# Altium PCB PCB1.pcbdoc
Units mil, origin at the board's own origin, x right, y up, seen from the top; angles counter-clockwise.
Board outline 1800 x 2040 mil, 2 copper layers (Top Layer, Bottom Layer); 13 components, 18 nets, 68 pads, 30 vias.
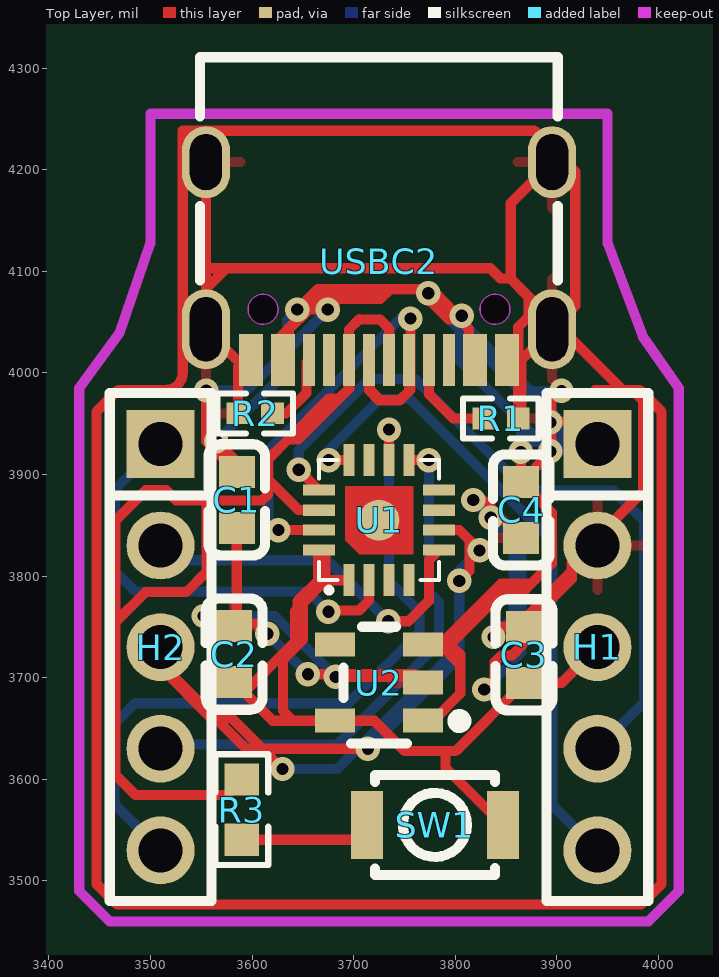
[diagram p0: Top Layer view]
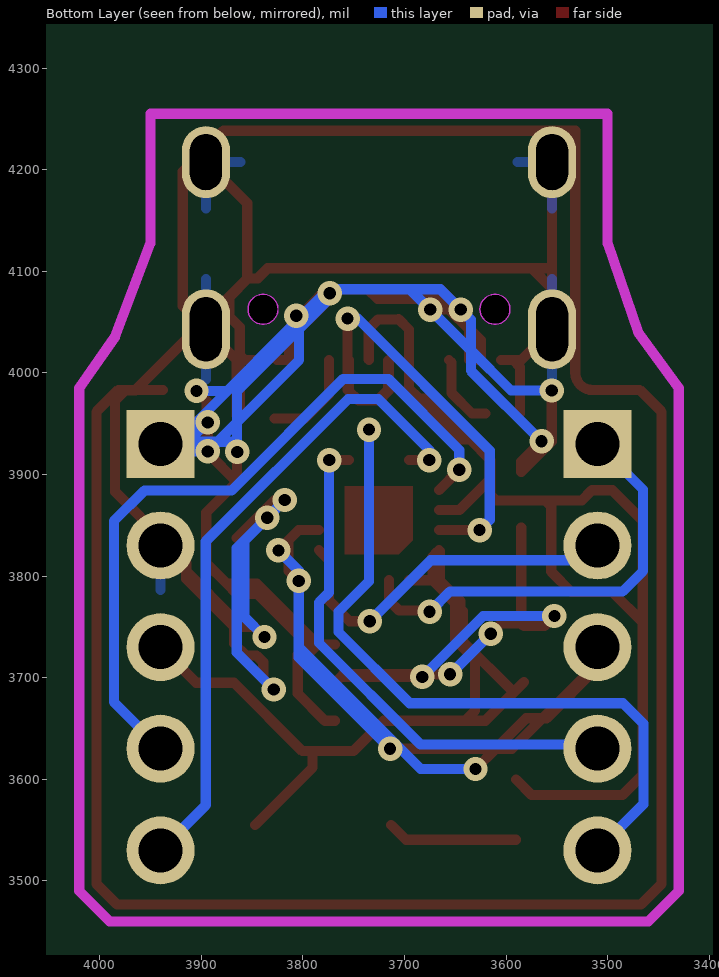
[diagram p1: Bottom Layer view, seen from below]

## Layer stack, top to bottom
Top Layer: signal copper (thickness not stored)
Dielectric: dielectric 12.6, FR-4, Dk 4.8
Bottom Layer: signal copper (thickness not stored)

## Board outline
4550,2750 2750,2750 2750,4790 4550,4790

## Design rules (kind name [scope] priority, off if disabled: settings)
BoardOutlineClearance copperThickness1oz [All] p0: genericclearance=10 ignorepadtopadclearanceinfootprint=FALSE except(0: Arc-SplitContinuation Track-SplitContinuation SMDPad-SplitContinuation THPad-SplitContinuation Via-SplitContinuation Fill-SplitContinuation Poly-SplitContinuation Region-SplitContinuation Text-SplitContinuation; 6: Track-CutoutEdge SMDPad-CutoutEdge THPad-CutoutEdge Via-CutoutEdge Region-CutoutEdge; 11.8: Track-OutlineEdge SMDPad-OutlineEdge THPad-OutlineEdge Via-OutlineEdge Fill-OutlineEdge Region-OutlineEdge Poly-OutlineEdge Text-OutlineEdge Fill-CutoutEdge)
BoardOutlineClearance copperThickness2oz [All] p0: genericclearance=10 ignorepadtopadclearanceinfootprint=FALSE except(0: Arc-SplitContinuation Track-SplitContinuation SMDPad-SplitContinuation THPad-SplitContinuation Via-SplitContinuation Fill-SplitContinuation Poly-SplitContinuation Region-SplitContinuation Text-SplitContinuation; 6: Track-CutoutEdge SMDPad-CutoutEdge THPad-CutoutEdge Via-CutoutEdge Region-CutoutEdge; 11.8: Track-OutlineEdge SMDPad-OutlineEdge THPad-OutlineEdge Via-OutlineEdge Fill-OutlineEdge Region-OutlineEdge Poly-OutlineEdge Text-OutlineEdge Fill-CutoutEdge)
Clearance copperThickness1oz [(InNet('+5V') OR InNet('GND') OR InNet('VCC') OR InNet('$1N1340') OR InNet('$1N1346') OR InNet('DN') OR InNet('DP') OR InNet('SDA') OR InNet('SCL') OR InNet('RX') OR InNet('TX') OR InNet('SCK') OR InNet('MISO') OR InNet('MOSI') OR InNet('$1N2150') OR InNet('$1N2123') OR InNet('$1N2118') OR InNet('$1N2274'))] p1: gap=7 ignorepadtopadclearanceinfootprint=FALSE except(4: Track-Track; 6: Track-SMDPad SMDPad-SMDPad Track-THPad SMDPad-THPad THPad-THPad Track-Via SMDPad-Via THPad-Via Via-Via SMDPad-Fill THPad-Fill Via-Fill Fill-Fill Track-Region SMDPad-Region THPad-Region Via-Region Region-Region Track-Poly SMDPad-Poly THPad-Poly Via-Poly Fill-Poly Region-Poly Poly-Poly Track-Text SMDPad-Text THPad-Text Via-Text Fill-Text Region-Text Poly-Text Text-Text; 6.9: Track-Hole SMDPad-Hole THPad-Hole Via-Hole Fill-Hole Region-Hole Poly-Hole Text-Hole Sheet-Hole; 11.8: Track-Fill Fill-Region Track-Sheet SMDPad-Sheet THPad-Sheet Via-Sheet Fill-Sheet Region-Sheet Poly-Sheet Text-Sheet)
Clearance copperThickness2oz [All] p1: gap=7 ignorepadtopadclearanceinfootprint=FALSE except(6: Track-SMDPad SMDPad-SMDPad Track-THPad SMDPad-THPad THPad-THPad Track-Via SMDPad-Via THPad-Via Via-Via SMDPad-Fill THPad-Fill Via-Fill Fill-Fill Track-Region SMDPad-Region THPad-Region Via-Region Region-Region Track-Poly SMDPad-Poly THPad-Poly Via-Poly Fill-Poly Region-Poly Poly-Poly Track-Text SMDPad-Text THPad-Text Via-Text Fill-Text Region-Text Poly-Text Text-Text; 6.9: Track-Hole SMDPad-Hole THPad-Hole Via-Hole Fill-Hole Region-Hole Poly-Hole Text-Hole Sheet-Hole; 8: Track-Track; 11.8: Track-Fill Fill-Region Track-Sheet SMDPad-Sheet THPad-Sheet Via-Sheet Fill-Sheet Region-Sheet Poly-Sheet Text-Sheet)
DiffPairsRouting differentialPair [All] p1: maxuncoupledlength=10 minlimit=6 maxlimit=6 mostfreqgap=6 toplayer_minwidth=5 toplayer_prefwidth=10 toplayer_maxwidth=100 bottomlayer_minwidth=5 bottomlayer_prefwidth=10 bottomlayer_maxwidth=100
PasteMaskExpansion pasteMaskExpansion [All] p1: expansion=0
PlaneConnect innerPlane [All] p1: planeconnectstyle=Relief reliefexpansion=20 reliefentries=4 reliefconductorwidth=10 reliefairgap=10
PolygonConnect copperRegion [All] p1: connectstyle=Relief reliefentries=4 reliefconductorwidth=10 polygonreliefangle="90 Angle" airgapwidth=10
RoutingVias viaSize [All] p1: viastyle="Through Hole" holewidth=12.0078 minholewidth=11.811 maxholewidth=248.0314 width=24.0158 minwidth=19.685 maxwidth=393.7008
SolderMaskExpansion solderMaskExpansion [All] p1: useseparateexpansions=TRUE expansion=2 expansionbottom=2
Width copperThickness1oz [All] p1: maxlimit=100 minlimit=5 preferedwidth=10
Width copperThickness2oz [All] p1: maxlimit=100 minlimit=8 preferedwidth=10

## Components (designator, comment, footprint, x,y, rotation, side; value= is the part's Value field where it differs from the comment)
C1 "" C0603 3585,3875 r90 top
C2 "" C0603 3582.41,3723.1 r270 top
C3 "" C0603 3867.68,3722.44 r270 top
C4 "" C0603 3865,3865 r90 top
H1 "" HDR-TH_5P-P2.54-V-M 3940,3730 r270 top
H2 "" HDR-TH_5P-P2.54-V-M 3510,3730 r270 top
R1 "" R0402 3845,3955 r0 top
R2 "" R0402 3603.16,3960 r0 top
R3 "" R0603 3590,3570 r270 top
SW1 "" KEY-SMD_B3U-1000PM 3780,3555 r0 top
U1 "" VQFN-16_L3.0-W3.0-P0.50-BL-EP1.7 3725,3855 r0 top
U2 "" SOT-23-5_L2.9-W1.6-P0.95-LS2.8-BR 3725,3695 r0 top
USBC2 "" USB-C_SMD-TYPE-C-31-M-12 3725,4110 r180 top

## Footprints (in the part's own frame and the unit in brackets; to place one, negate y for a bottom-side part, rotate by r counter-clockwise, add the part's x,y. Pads: shape width x height; smd on the part's side, far side on the other; paste and mask are expansions set on the pad)
C0603 [mm]
  rect 0.8x0.9 smd: 1(-0.7,0) 2(0.7,0)
  silkscreen extent -1.39,-0.71 1.39,0.71
HDR-TH_5P-P2.54-V-M [mm]
  rect 1.7x1.7 hole 1.1: 1(-5.08,0)
  round 1.7 hole 1.1: 2(-2.54,0) 3(0,0) 4(2.54,0) 5(5.08,0)
  silkscreen extent -6.35,-1.27 6.35,1.27
KEY-SMD_B3U-1000PM [mm]
  rect 0.8x1.7 smd: 1(-1.7,0) 2(1.7,0)
  silkscreen extent -1.5,-1.25 1.5,1.25
R0402 [mm]
  rect 0.566x0.54 smd: 1(-0.433,0) 2(0.433,0)
  silkscreen extent -0.94,-0.5 0.94,0.5
R0603 [mil]
  rect 31.75x34.02 smd: 1(-29.66,0) 2(29.66,0)
  silkscreen extent -55,-26 55,26
SOT-23-5_L2.9-W1.6-P0.95-LS2.8-BR [mm]
  rect 1x0.6 smd: 1(1.1,-0.95) 2(1.1,0) 3(1.1,0.95) 4(-1.1,0.95) 5(-1.1,-0.95)
  silkscreen extent -0.89,-1.52 2.16,1.4
USB-C_SMD-TYPE-C-31-M-12 [mm]
  oval 1.2x2 hole 0.8 slot 1.6 at 90 deg: 0(-4.325,1.706) 1(4.325,1.706)
  oval 1.2x1.8 hole 0.8 slot 1.4 at 90 deg: 2(4.325,-2.474) 3(-4.325,-2.474)
  rect 0.3x1.3 smd: A1(-3.35,2.474) A4(-2.55,2.474) A5(-1.25,2.474) A6(-0.25,2.474) A7(0.25,2.474) A8(1.25,2.474) A9(2.55,2.474) A12(3.35,2.474) B1(3.05,2.474) B4(2.25,2.474) B5(1.75,2.474) B6(0.75,2.474) B7(-0.75,2.474) B8(-1.75,2.474) B9(-2.25,2.474) B12(-3.05,2.474)
  Board Outline Layer circle w0.005: c-2.9,1.206 r0.375
  Board Outline Layer circle w0.005: c2.9,1.206 r0.375
  Board Outline Layer region: -3.275,1.206 -3.238,1.368 -3.134,1.499 -2.983,1.571 -2.816,1.571 -2.666,1.499 -2.562,1.368 -2.525,1.206 -2.525,1.206 -2.562,1.043 -2.666,0.912 -2.816,0.84 -2.983,0.84 -3.134,0.912 -3.238,1.043 -3.275,1.206
  Board Outline Layer region: 2.525,1.206 2.562,1.368 2.666,1.499 2.816,1.571 2.983,1.571 3.134,1.499 3.238,1.368 3.275,1.206 3.275,1.206 3.238,1.043 3.134,0.912 2.983,0.84 2.816,0.84 2.666,0.912 2.562,1.043 2.525,1.206
  Multi-Layer board cut-out: -3.275,1.206 -3.238,1.368 -3.134,1.499 -2.983,1.571 -2.816,1.571 -2.666,1.499 -2.562,1.368 -2.525,1.206 -2.525,1.206 -2.562,1.043 -2.666,0.912 -2.816,0.84 -2.983,0.84 -3.134,0.912 -3.238,1.043 -3.275,1.206
  Multi-Layer board cut-out: 2.525,1.206 2.562,1.368 2.666,1.499 2.816,1.571 2.983,1.571 3.134,1.499 3.238,1.368 3.275,1.206 3.275,1.206 3.238,1.043 3.134,0.912 2.983,0.84 2.816,0.84 2.666,0.912 2.562,1.043 2.525,1.206
  silkscreen extent -4.47,-5.09 4.47,0.49
VQFN-16_L3.0-W3.0-P0.50-BL-EP1.7 [mm]
  rect 0.28x0.8 smd: 1(-0.749,-1.5) 2(-0.249,-1.5) 3(0.249,-1.5) 4(0.749,-1.5) 9(0.749,1.5) 10(0.249,1.5) 11(-0.249,1.5) 12(-0.749,1.5)
  rect 0.8x0.28 smd: 5(1.5,-0.749) 6(1.5,-0.249) 7(1.5,0.249) 8(1.5,0.749) 13(-1.5,0.749) 14(-1.5,0.249) 15(-1.5,-0.249) 16(-1.5,-0.749)
  round 1.02 smd: 17(0,0)
  Top Layer region: -0.85,-0.5 -0.85,0.85 0.85,0.85 0.85,-0.85 -0.5,-0.85
  silkscreen extent -1.5,-1.76 1.5,1.5

## Via types
v1: diameter 24.02, hole 12.01, Top Layer to Bottom Layer, 30 vias

## Nets (pads, with @x,y where several pads share a name; then routed paths per layer and width w, separated by ;. In a path a pad name is that pad's centre, name@x,y a point inside that pad or via, vN(x,y) a via of type N, cw(c..) or ccw(c..) an arc to the next point about the centre after c; other vN are vias at no path point)
$1N1340: R1.1 USBC2.A5 | length 97.4
  Top Layer w10: USBC2.A5 3774.21,3978.75 3797.96,3955 R1.1
$1N1346: R2.2 USBC2.B5 | length 75.3
  Top Layer w10: R2.2 3633.51,3960 3653.51,3980 3653.51,4010 USBC2.B5
$1N2118: U1.7
$1N2123: U1.8
$1N2150: U1.11
$1N2274: R3.2 SW1.1 | length 129.1
  Top Layer w10: R3.2 3698.41,3540.34 SW1.1
+5V: C1.2 C4.2 H1.1 U2.1 U2.3 USBC2.A4 USBC2.A9 USBC2.B4 USBC2.B9 | length 3039.6
  Top Layer w10: v1(3555,3982.56) 3555,3932.56 C1.2 3585,3912.56 v1(3565,3932.56) ; U2.1 3778.31,3657.61 3805,3684.3 3805,3712.56 ; U2.3@3768.47,3732.56 U2.3@3785,3732.56 ; v1(3773.45,4078.3) v1@3777.87,4078.3 ; v1(3806.41,4056.18) 3804.32,4056.18 v1@3803.58,4055.43 ; USBC2.A4 USBC2.B9 3813.58,4042.59 ; v1(3864.6,3922.16) 3864.6,3892.96 C4.2 ; v1(3893.61,3951.17) v1@3893.61,3921.17 ; v1(3904.6,3982.16) 3894.6,3972.16 v1@3894.6,3952.16 ; H1.1 3917.84,3952.16 v1@3894.6,3952.16 ; v1@3644.6,4052.16 v1(3644.6,4062.16) 3664.6,4082.16 3675.99,4082.16 ; v1@3644.6,4052.16 3654.6,4062.16 v1@3655.99,4062.16 ; v1@3644.6,4052.16 3624.6,4032.16 USBC2.A9 USBC2.B4 3636.42,4042.59 v1@3655.99,4062.16 ; v1@3655.99,4062.16 v1(3674.6,4062.16) 3685.03,4072.59 ; v1@3655.99,4062.16 3666.42,4072.59 ; 3666.42,4072.59 3675.99,4082.16 ; 3666.42,4072.59 3685.03,4072.59 ; 3675.99,4082.16 3694.6,4082.16 ; 3675.99,4082.16 3676.42,4082.59 3736.42,4082.59 ; 3685.03,4072.59 3694.6,4082.16 ; 3685.03,4072.59 3726.42,4072.59 3735.99,4082.16 ; 3694.6,4082.16 3735.99,4082.16 ; 3735.99,4082.16 v1@3764.01,4082.16 ; 3735.99,4082.16 3736.42,4082.59 ; 3736.42,4082.59 v1@3763.58,4082.59 ; v1@3763.58,4082.59 v1@3764.01,4082.16 ; v1@3763.58,4082.59 v1@3773.58,4082.59 ; v1@3764.01,4082.16 3793.58,4052.59 v1@3803.58,4052.59 ; v1@3764.01,4082.16 v1@3774.01,4082.16 ; v1@3773.58,4082.59 v1@3774.01,4082.59 ; v1@3773.58,4082.59 v1@3774.01,4082.16 ; v1@3774.01,4082.16 v1@3774.6,4082.16 ; v1@3774.01,4082.16 v1@3777.87,4078.3 ; v1@3774.01,4082.59 v1@3774.6,4082.16 ; v1@3774.01,4082.59 3776.42,4082.59 3793.21,4065.8 ; v1@3774.6,4082.16 3790.96,4065.8 ; v1@3777.87,4078.3 3790.37,4065.8 ; U2.3@3785,3732.56 3845,3792.56 3875,3792.56 ; U2.3@3785,3732.56 3805,3712.56 ; U2.3@3785,3732.56 3795,3732.56 ; 3790.37,4065.8 3790.96,4065.8 ; 3790.37,4065.8 v1@3803.58,4052.59 ; 3790.96,4065.8 3793.21,4065.8 ; 3790.96,4065.8 v1@3803.58,4053.18 ; 3793.21,4065.8 v1@3803.58,4055.43 ; 3795,3732.56 3845,3782.56 3865,3782.56 3875,3792.56 ; 3795,3732.56 3805,3722.56 3805,3712.56 ; v1@3803.58,4052.59 v1@3803.58,4053.18 ; v1@3803.58,4052.59 3813.58,4042.59 ; v1@3803.58,4053.18 3813.58,4043.18 3813.58,4042.59 ; v1@3803.58,4053.18 v1@3803.58,4055.43 ; C4.2 3895,3862.56 3895,3812.56 3875,3792.56 ; C4.2 v1@3893.61,3921.17 ; v1@3893.61,3921.17 3894.6,3922.16 v1@3894.6,3952.16
  Bottom Layer w10: v1(3555,3982.56) 3595,3982.56 3634.6,4022.16 ; v1(3565,3932.56) 3634.6,4002.16 3634.6,4022.16 ; v1(3773.45,4078.3) v1@3803.58,4048.17 ; v1(3806.41,4056.18) 3806.41,4056.01 v1@3803.58,4053.18 ; v1(3864.6,3922.16) v1@3864.6,3932.16 ; v1(3893.61,3951.17) 3903.61,3941.17 H1.1@3915,3941.17 ; v1(3904.6,3982.16) 3874.6,3982.16 3816.42,4040.34 ; 3634.6,4022.16 3634.6,4052.16 v1(3644.6,4062.16) 3664.6,4082.16 3694.6,4082.16 ; 3634.6,4022.16 v1(3674.6,4062.16) 3694.6,4082.16 ; 3694.6,4082.16 v1@3764.6,4082.16 ; v1@3764.6,4082.16 3774.6,4082.16 v1@3803.58,4053.18 ; v1@3764.6,4082.16 3803.58,4043.18 ; 3803.58,4043.18 3864.6,3982.16 3864.6,3951.57 ; 3803.58,4043.18 3803.58,4012.59 3864.6,3951.57 ; 3803.58,4043.18 v1@3803.58,4048.17 ; v1@3803.58,4048.17 3811.41,4040.34 3816.42,4040.34 ; v1@3803.58,4048.17 v1@3803.58,4053.18 ; v1@3803.58,4053.18 3816.42,4040.34 ; 3816.42,4040.34 3816.42,4039.75 H1.1@3915,3941.17 ; v1@3864.6,3932.16 3864.6,3951.57 ; v1@3864.6,3932.16 3884.01,3932.16 ; 3864.6,3951.57 3884.01,3932.16 ; 3884.01,3932.16 v1(3893.58,3922.59) 3932.59,3922.59 H1.1 H1.1@3937.84,3932.16 ; 3884.01,3932.16 H1.1@3937.84,3932.16 ; H1.1@3915,3941.17 3928.83,3941.17 H1.1@3937.84,3932.16
DN: U1.15 USBC2.A7 USBC2.B7 | length 561.5
  Top Layer w10: v1(3625.95,3845.2) U1.15 ; v1(3755.95,4053.38) USBC2.B7@3755.95,4013.38 ; 3745.95,3973.38 3725.95,3973.38 3715.95,3983.38 3715.95,4011.81 USBC2.A7 3715.16,3982.59 3725.16,3972.59 3745.16,3972.59 3745.95,3973.38 ; 3745.95,3973.38 3754.53,3981.96 ; 3754.53,3981.96 USBC2.B7 USBC2.B7@3755.95,4013.38 ; 3754.53,3981.96 3755.95,3983.38 USBC2.B7@3755.95,4013.38
  Bottom Layer w10: v1(3625.95,3845.2) 3615.95,3855.2 3615.95,3923.38 3745.95,4053.38 v1(3755.95,4053.38)
DP: R3.1 U1.14 USBC2.A6 USBC2.B6 | length 1216.1
  Top Layer w10: R3.1 3574.67,3584.33 3485.47,3584.33 3465.47,3604.33 3465.47,3754.33 ; U1.14 3645.95,3864.8 3615.95,3894.8 3615.95,3914.8 ; 3695.95,3984.8 3695.47,3984.33 ; 3705.71,4052.83 3705.47,4052.59 ; 3465.47,3754.33 3495.47,3784.33 3535.47,3784.33 3555.47,3804.33 3555.47,3868.56 3561.24,3874.33 ; 3465.47,3754.33 3465.47,3854.33 3495.47,3884.33 3515.47,3884.33 3525.47,3874.33 3561.24,3874.33 ; 3561.24,3874.33 3609.7,3874.33 3615.47,3880.1 3615.47,3914.33 3615.95,3914.8 ; 3615.95,3914.8 3635.47,3934.33 ; 3635.47,3934.33 3645.47,3934.33 3685.95,3974.8 ; 3635.47,3934.33 3675.95,3974.8 3685.95,3974.8 ; 3685.95,3974.8 3695.47,3984.33 ; 3695.47,3984.33 USBC2.B6 3695.47,4042.59 3705.47,4052.59 ; 3705.47,4052.59 3725.47,4052.59 ; 3725.47,4052.59 3725.95,4052.59 3734.84,4043.7 3734.84,4043.22 ; 3725.47,4052.59 3734.84,4043.22 ; 3734.84,4043.22 USBC2.A6 3735.47,4013.22 3735.47,4042.59 3734.84,4043.22
GND: C1.1 C2.1 C3.1 C4.1 H1.2 R1.2 R2.1 U2.2 USBC2.0 USBC2.1 USBC2.2 USBC2.3 USBC2.A1 USBC2.A12 USBC2.B1 USBC2.B12 | length 5251.6
  Top Layer w10: v1(3552.41,3760.66) 3562.41,3750.66 C2.1 C2.1@3585,3753.25 ; USBC2.2 3554.72,4102.84 ; C1.1 C2.1@3585,3753.25 ; R2.1 3586.12,4005.6 USBC2.A12 ; USBC2.B1 USBC2.A12 ; v1(3615,3743.25) 3605,3753.25 C2.1@3585,3753.25 ; v1(3655,3703.25) 3760.06,3703.25 U2.2@3762.65,3700.66 ; v1(3682.41,3700.66) U2.2@3762.65,3700.66 ; U2.2 U2.2@3762.65,3700.66 ; v1(3817.68,3874.76) 3827.68,3874.76 v1@3845.12,3857.32 ; v1(3828.57,3688.29) 3838.98,3698.7 3838.98,3715.18 3845.41,3721.61 3855.74,3721.61 3867.68,3733.55 C3.1 ; v1(3835,3857.32) v1@3845.12,3857.32 ; v1(3837.68,3740) 3847.68,3750 C3.1 ; USBC2.B12 USBC2.A1 ; C4.1 v1@3845.12,3857.32 ; USBC2.3 3854.72,4166.84 3854.72,4092.84 ; 3937.79,3983.19 3964.37,3983.19 ; 3554.72,4082.84 3574.72,4102.84 ; 3554.72,4082.84 USBC2.1 3584.97,4012.59 USBC2.A12 ; 3554.72,4082.84 3554.72,4102.84 ; 3554.72,4102.84 3574.72,4102.84 ; 3574.72,4102.84 3834.2,4102.84 ; 3834.2,4102.84 3844.2,4092.84 3844.72,4092.84 ; 3834.2,4102.84 3834.72,4102.84 3844.72,4092.84 ; 3844.72,4092.84 3854.2,4092.84 ; 3854.2,4092.84 3872.04,4075 USBC2.0@3872.04,4055 ; 3854.2,4092.84 3854.72,4092.84 ; 3854.72,4092.84 USBC2.0@3900,4047.56 ; USBC2.A1 3859.3,4015 USBC2.A1@3862.04,4015 ; USBC2.A1 USBC2.A1@3862.04,4012.75 ; USBC2.A1@3862.04,4012.75 3865.28,4012.84 ; USBC2.A1@3862.04,4012.75 USBC2.A1@3862.04,4015 ; USBC2.A1@3862.04,4012.75 R1.2 3865.28,3958.24 3865.28,4012.84 ; USBC2.A1@3862.04,4015 3862.04,4045 USBC2.0@3872.04,4055 ; 3865.28,4012.84 USBC2.0 ; C3.1 3867.68,3757.68 3914.72,3804.72 ; C3.1 3914.72,3797.04 3914.72,3804.72 ; USBC2.0@3872.04,4055 3883.12,4055 USBC2.0 ; USBC2.0 USBC2.0@3904.72,4042.84 ; USBC2.0 USBC2.0@3900,4047.56 ; USBC2.0@3900,4047.56 USBC2.0@3904.72,4042.84 ; USBC2.0@3900,4047.56 3918.19,4065.75 3918.19,4198.19 3878.19,4238.19 3531.81,4238.19 3531.81,4000 cw(c3515,4000) 3515,3983.19 3468.45,3983.19 3446.81,3961.55 3446.81,3496.96 3466.96,3476.81 3983.04,3476.81 4003.19,3496.96 4003.19,3961.55 3981.55,3983.19 3964.37,3983.19 ; USBC2.0@3904.72,4042.84 3964.37,3983.19 ; 3914.72,3804.72 H1.2 3937.16,3832.84 H1.2@3934.72,3832.84 ; 3914.72,3804.72 3914.72,3812.84 H1.2@3934.72,3832.84 ; H1.2@3934.72,3832.84 3984.72,3882.84 3984.72,3972.84 3974.72,3982.84 3964.72,3982.84 3964.37,3983.19
  Bottom Layer w10: v1(3552.41,3760.66) 3622.41,3760.66 v1(3682.41,3700.66) ; v1(3615,3743.25) v1(3655,3703.25) ; v1(3817.68,3874.76) 3835.06,3857.38 3857.68,3834.76 3857.68,3834.64 ; v1(3828.57,3688.29) 3865,3724.72 3865,3827.32 3857.68,3834.64 ; v1(3835,3857.32) 3857.68,3834.64 ; v1(3837.68,3740) 3857.68,3760 3857.68,3834.64
MISO: H2.2 U1.5 | length 357.3
  Top Layer w10: v1(3734.05,3755.51) 3754.05,3755.51 3774.05,3775.51 3774.05,3815.51 U1.5
  Bottom Layer w10: H2.2 3524.49,3815.51 3674.05,3815.51 v1(3734.05,3755.51)
MOSI: H2.1 U1.2 | length 434.9
  Top Layer w10: v1(3675.2,3764.8) 3676.36,3765.95 3705.2,3765.95 3715.2,3775.95 U1.2
  Bottom Layer w10: H2.1 3465.2,3885.2 3465.2,3804.8 3485.2,3784.8 3655.2,3784.8 v1(3675.2,3764.8)
RX: H2.5 U1.10 | length 722.5
  Top Layer w10: U1.10 v1(3734.8,3944.05)
  Bottom Layer w10: H2.5 3464.8,3575.2 3464.8,3654.8 3484.8,3674.8 3694.8,3674.8 3764.8,3744.8 3764.8,3764.8 3734.8,3794.8 v1(3734.8,3944.05)
SCK: H2.3 U1.6 | length 993.2
  Top Layer w10: v1(3630,3610) 3610,3630 ; v1(3714.05,3630) 3610,3630 ; U1.6 3804.05,3845.2 3814.05,3835.2 ; v1(3804.05,3795.2) 3814.05,3805.2 3814.05,3835.2 ; v1(3824.05,3825.2) 3814.05,3835.2 ; 3564.05,3660 3594.05,3630 3610,3630 ; 3564.05,3660 3514.05,3710 3514.05,3725.95 H2.3 3510,3710 3560,3660 3564.05,3660 ; 3564.05,3660 3580,3660 3610,3630
  Bottom Layer w10: v1(3630,3610) 3684.05,3610 3804.05,3730 ; v1(3714.05,3630) 3804.05,3720 3804.05,3730 ; v1(3824.05,3825.2) 3804.05,3805.2 v1(3804.05,3795.2) 3804.05,3730
SCL: H1.5 U1.12 | length 651.2
  Top Layer w10: v1(3675.51,3914.05) U1.12
  Bottom Layer w10: v1(3675.51,3914.05) 3675.51,3924.05 3725.51,3974.05 3755.51,3974.05 3895.51,3834.05 3895.51,3574.49 H1.5
SDA: H1.4 U1.13 | length 717.9
  Top Layer w10: v1(3645.95,3904.51) U1.13
  Bottom Layer w10: v1(3645.95,3904.51) 3645.95,3924.05 3715.95,3994.05 3760.18,3994.05 3870.18,3884.05 3955.95,3884.05 3985.95,3854.05 3985.95,3675.95 H1.4
TX: H2.4 U1.9 | length 520.8
  Top Layer w10: U1.9 v1(3774.05,3914.05)
  Bottom Layer w10: H2.4 3514.05,3634.05 3684.05,3634.05 3784.05,3734.05 3784.05,3774.05 3774.05,3784.05 v1(3774.05,3914.05)
VCC: C2.2 C3.2 H1.3 SW1.2 U1.1 U1.16 U2.5 | length 1042.2
  Top Layer w10: C2.2 C2.2@3592.41,3685.54 ; SW1.2 3790.35,3611.58 3790.35,3627.59 ; H1.3 3904.88,3694.88 C3.2 3800.39,3627.59 3790.35,3627.59 ; C2.2@3592.41,3685.54 3642.41,3735.54 ; C2.2@3592.41,3685.54 3620.35,3657.59 3640.35,3657.59 ; 3640.35,3657.59 3630.35,3667.59 3630.35,3717.59 3650.35,3737.59 3650.35,3773.48 ; 3640.35,3657.59 U2.5 3720.35,3657.59 3750.35,3627.59 3790.35,3627.59 ; 3642.41,3735.54 3642.41,3765.54 3645.1,3768.22 ; 3642.41,3735.54 3645.1,3738.22 3645.1,3768.22 ; 3645.1,3768.22 3645.1,3775.54 3665.1,3795.54 ; 3645.1,3768.22 3650.35,3773.48 ; 3650.35,3773.48 3672.41,3795.54 ; 3650.35,3773.48 3650.35,3777.59 3668.29,3795.54 ; 3665.1,3795.54 3665.1,3824.66 U1.16 U1.16@3668.7,3822.75 ; 3665.1,3795.54 3668.29,3795.54 ; 3668.29,3795.54 3672.41,3795.54 ; 3668.29,3795.54 3668.7,3795.95 ; 3668.7,3795.95 U1.16@3668.7,3822.75 ; 3668.7,3795.95 3672.41,3795.95 ; U1.16@3668.7,3822.75 3672.41,3819.04 3672.41,3795.95 ; 3672.41,3795.54 3695.1,3795.54 U1.1 3672.41,3795.95 ; 3672.41,3795.54 3672.41,3795.95
pads on no net: U1.3 U1.4 U1.17 U2.4 USBC2.A8 USBC2.B8

## Polygon pours and split planes (outlines as drawn)
GND on Top Layer (solid, remove dead copper, pour order 0): 3135,4540 4265,4540 4265,3000 3135,3000
GND on Bottom Layer (solid, remove dead copper, pour order 2): 3000,4475 4300,4475 4300,3010 3000,3010

## Keep-outs
Board Outline Layer:
  lines w10: 3430,3490 3430,3985 3470,4040 3500,4127.5 3500,4255 3950,4255 3950,4127.5 3985,4035 4020,3985 4020,3490 3990,3460 3460,3460 3430,3490